# EAGLE board AirQuality (EAGLE 5.12)
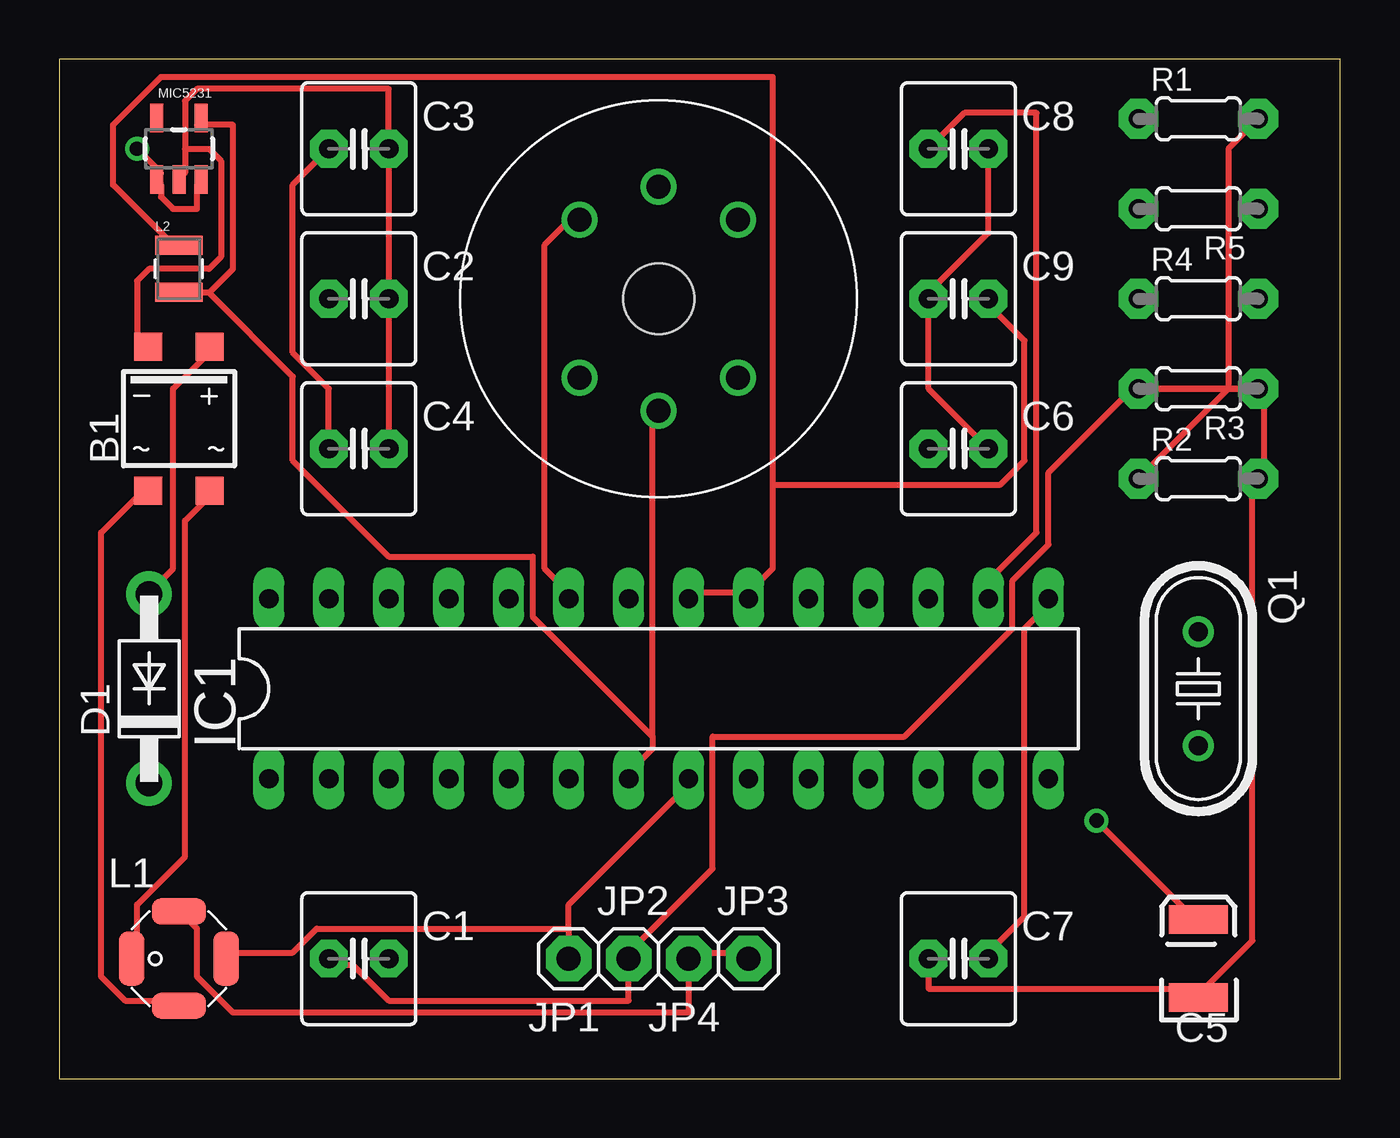
[diagram p0: board, top side]
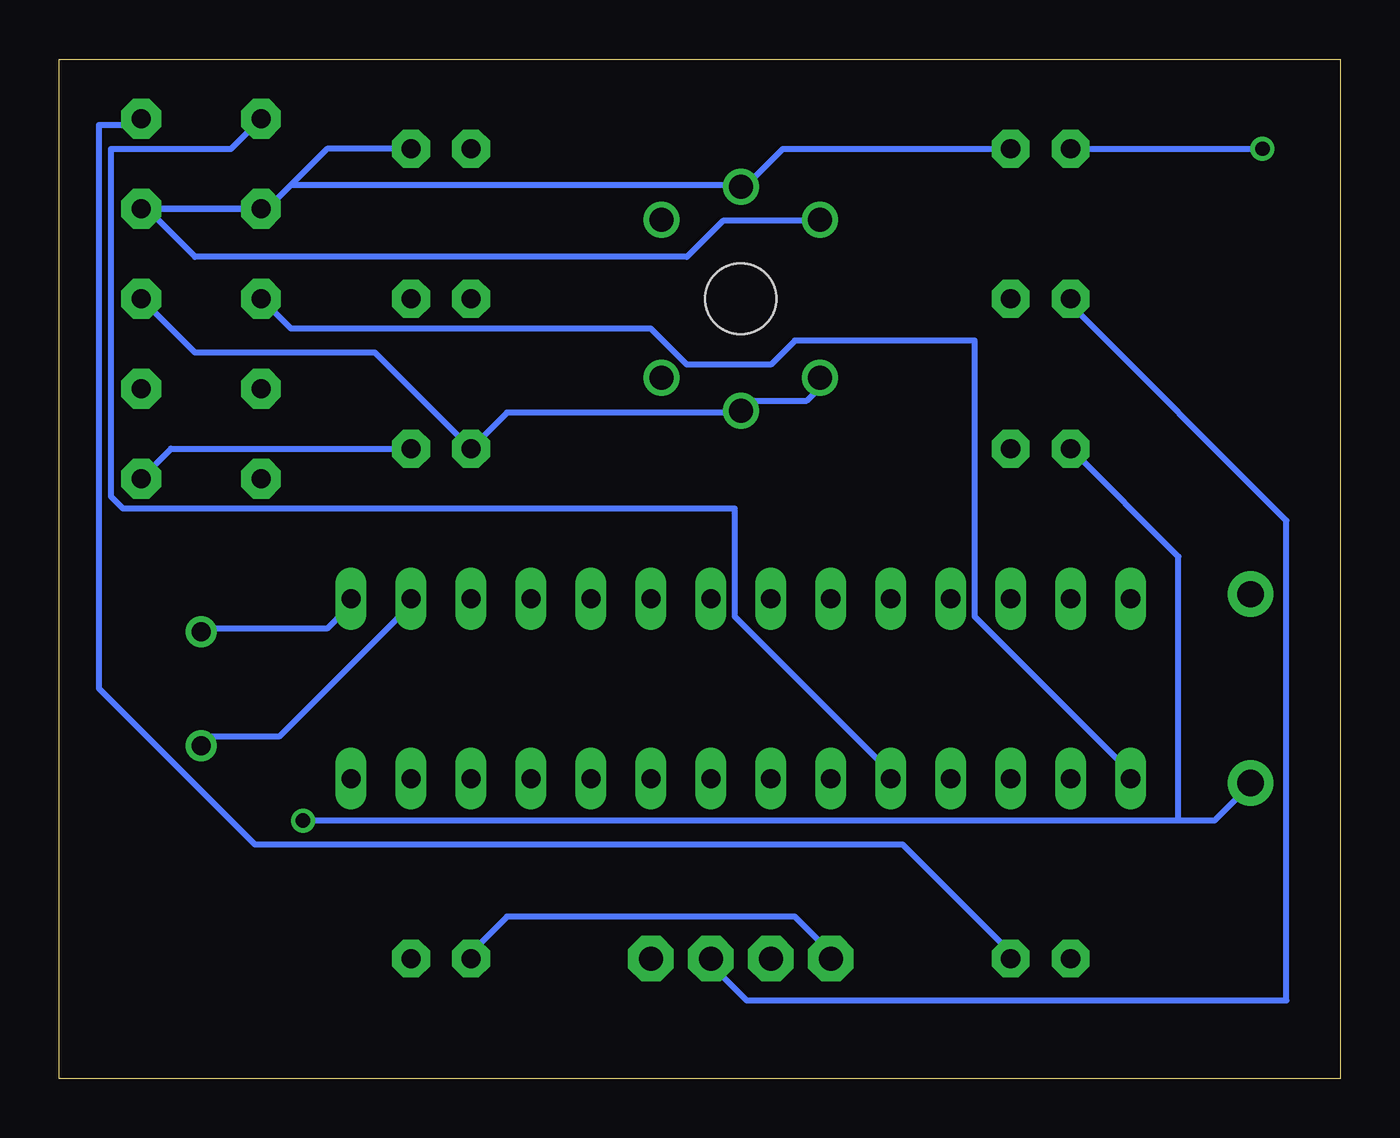
[diagram p1: board, bottom side, seen from below]

Size 54.28 x 43.17 mm. Coordinates in mm from the lower left corner, seen from the top.
Outline: 0,0 54.28,0 54.28,43.17 0,43.17 0,0
Copper layers (1*16): Top 0.035mm / dielectric 1.5mm / Bottom 0.035mm
Design rules "default": minimum track width 10mil, minimum drill 24mil, track to track 8mil, track to pad 8mil, pad to pad 8mil, via to via 8mil, smd to smd 8mil, copper to edge 40mil, drill to drill 8mil, minimum pad ring 10mil, minimum via ring 8mil, stop-mask expansion 4mil, vias tented up to drill 0mil, thermal gap 10mil

## Footprints (pad centres in the part's own frame; a part is rotated, then mirrored left to right if it is on the bottom)
SOIC-4 = smd 1.2 x 1.2: + 1.3,3.05; - -1.3,3.05; ~1 -1.3,-3.05; ~2 1.3,-3.05
C2.5-6 = drill 0.813 pad 1.6 octagon: 1 -1.27,0; 2 1.27,0
EIA3528 = smd 1.2 x 2.5: A 1.65,0; C -1.65,0
DO41-7 = drill 1.118 pad 1.93 round: A 4,0; C -4,0
DIL28-3 = drill 0.813 long: 1 -16.51,-3.81; 2 -13.97,-3.81; 3 -11.43,-3.81; 4 -8.89,-3.81; 5 -6.35,-3.81; 6 -3.81,-3.81; 7 -1.27,-3.81; 8 1.27,-3.81; 9 3.81,-3.81; 10 6.35,-3.81; 11 8.89,-3.81; 12 11.43,-3.81; 13 13.97,-3.81; 14 16.51,-3.81; 15 16.51,3.81; 16 13.97,3.81; 17 11.43,3.81; 18 8.89,3.81; 19 6.35,3.81; 20 3.81,3.81; 21 1.27,3.81; 22 -1.27,3.81; 23 -3.81,3.81; 24 -6.35,3.81; 25 -8.89,3.81; 26 -11.43,3.81; 27 -13.97,3.81; 28 -16.51,3.81
1X01 = drill 1.016 pad 1.93 octagon: 1 0,0
LPD4012 = smd 1.1 x 2.3: 1 -2,0; 3 2,0 | smd 2.3 x 1.1: 2 0,-2; 4 0,2
1007 = smd 2 x 0.8: 1 0,1; 2 0,-1
SOT23-5 = smd 0.55 x 1.2: 1 -0.95,-1.3; 2 0,-1.3; 3 0.95,-1.3; 4 0.95,1.3; 5 -0.95,1.3
MQ-3 = drill 1.016 round: A1 -3.35,3.35; A2 -3.35,-3.35; B1 3.35,3.35; B2 3.35,-3.35; HA -4.75,0; HB 4.75,0 | hole 3: 0,0
HC49U-V = drill 0.813 round: 1 -2.413,0; 2 2.413,0
0204/5 = drill 0.813 pad 1.676 octagon: 1 -2.54,0; 2 2.54,0

## Placement (x,y rotation side)
B1  MB1S  [SOIC-4]  5.08,27.94 0 top
C1  0.2uF  [C2.5-6]  12.7,5.08 0 top
C2  0.2uF  [C2.5-6]  12.7,33.02 0 top
C3  10uF  [C2.5-6]  12.7,39.37 0 top
C4  1uF  [C2.5-6]  12.7,26.67 0 top
C5  2.2uF  [EIA3528]  48.26,5.08 90 top
C6  10uF  [C2.5-6]  38.1,26.67 0 top
C7  0.2uF  [C2.5-6]  38.1,5.08 0 top
C8  0.2uF  [C2.5-6]  38.1,39.37 0 top
C9  100nF  [C2.5-6]  38.1,33.02 0 top
D1  [DO41-7]  3.81,16.51 90 top
IC1  ATMEGA168-20P  [DIL28-3]  25.4,16.51 0 top
JP1  [1X01]  21.59,5.08 180 top
JP2  [1X01]  24.13,5.08 0 top
JP3  [1X01]  29.21,5.08 0 top
JP4  [1X01]  26.67,5.08 180 top
L1  LPD4012  [LPD4012]  5.08,5.08 0 top
L2  10uH  [1007]  5.08,34.29 0 top
MIC5231  [SOT23-5]  5.08,39.37 0 top
MQ-135  GAS_SENSOR  [MQ-3]  25.4,33.02 90 top
Q1  16 MHz  [HC49U-V]  48.26,16.51 270 top
R1  10k  [0204/5]  48.26,40.64 0 top
R2  2k  [0204/5]  48.26,25.4 0 top
R3  2k  [0204/5]  48.26,29.21 180 top
R4  10k  [0204/5]  48.26,33.02 0 top
R5  10k  [0204/5]  48.26,36.83 180 top

## Library data of the parts
B1 = rectifier
C1-C4 C6-C9 = capacitor-wima
C5 L2 MIC5231 MQ-135 = SparkFun
D1 IC1 JP1-JP4 R1-R5 = adafruit
L1 = LPD4012
Q1 = crystal; OC_FARNELL: 1666969; OC_NEWARK: unknown

## Nets
N$1: IC1.1 R4.1
N$2: C1.2 R1.2 R2.1
N$3: C1.1 JP2.1 R3.1
N$4: C3.1 C4.1 C5.A D1.C MIC5231.1 MIC5231.3
N$5: C6.1 IC1.7 L2.2 MIC5231.4 MQ-135.A1 MQ-135.HA R4.2
N$6: C2.1 JP3.1 JP4.1 L1.4
N$7: B1.~1 L1.2
N$8: B1.~2 L1.1
N$9: B1.+ D1.A
N$10: C8.1 IC1.16 Q1.2
N$11: B1.- C2.2 C3.2 C4.2 C5.C C6.2 C7.1 C8.2 C9.1 IC1.8 JP1.1 L1.3 MIC5231.2 MQ-135.HB R2.2 R3.2 R5.1
N$12: C9.2 IC1.20 IC1.21 L2.1
N$13: IC1.5 R1.1
N$14: IC1.23 MQ-135.B1 R5.2
N$16: C7.2 IC1.15 Q1.1

## Tracks (layer width: path | path; a pad name or v marks a point on that pad's centre or on a via)
N$1
  Bottom 0.254: IC1.1 8.89,12.95 15.49,19.56 15.49,31.24 23.11,31.24 24.13,30.23 27.69,30.23 29.21,31.75 44.45,31.75 R4.1
N$2
  Top 0.254: R2.1 49.53,29.21 49.53,39.37 R1.2
  Bottom 0.254: C1.2 13.97,5.33 18.54,9.91 45.97,9.91 52.58,16.51 52.58,40.39 51.05,40.39 R1.2
N$3
  Top 0.254: C1.1 11.43,4.83 12.45,4.83 13.97,3.3 24.13,3.3 JP2.1 24.13,5.33 27.69,8.89 27.69,14.48 35.81,14.48 40.39,19.05 40.39,21.08 41.91,22.61 41.91,25.65 45.47,29.21 R3.1
N$4  (via drill 0.61)
  Top 0.254: MIC5231.3 5.84,37.85 5.84,36.83 4.83,36.83 4.32,37.34 4.32,37.85 MIC5231.1 4.32,38.35 v3.3,39.37 | v43.94,10.92 48.01,6.86 C5.A | C3.1 9.91,37.85 9.91,30.73 11.43,29.21 C4.1
  Bottom 0.254: C3.1 v3.3,39.37 | 6.86,10.92 5.33,10.92 3.81,12.45 D1.C | 6.86,10.92 v43.94,10.92 | C4.1 6.86,22.1 6.86,10.92
N$5
  Top 0.254: 6.35,33.27 7.37,34.29 7.37,40.39 5.84,40.39 MIC5231.4 | 6.35,33.27 5.33,33.27 L2.2 | 25.15,14.48 25.15,28.19 MQ-135.HA | 25.15,14.48 25.15,13.97 24.13,12.95 IC1.7 | 6.35,33.27 9.91,29.72 9.91,26.16 13.97,22.1 20.07,22.1 20.07,19.56 25.15,14.48
  Bottom 0.254: MQ-135.A1 22.1,29.21 22.61,28.7 25.15,28.7 MQ-135.HA 25.65,28.19 35.31,28.19 C6.1 40.89,30.73 48.51,30.73 R4.2
N$6
  Top 0.254: L1.4 5.33,6.86 5.84,6.35 5.84,4.32 7.37,2.79 26.67,2.79 JP4.1 26.67,5.33 29.21,5.33 JP3.1
  Bottom 0.254: C2.1 11.43,32.77 2.29,23.62 2.29,3.3 25.15,3.3 26.67,4.83 JP4.1
N$7
  Top 0.254: B1.~1 3.3,24.64 1.78,23.11 1.78,4.32 2.79,3.3 4.83,3.3 L1.2
N$8
  Top 0.254: B1.~2 6.35,24.64 5.33,23.62 5.33,9.4 3.3,7.37 3.3,5.33 L1.1
N$9
  Top 0.254: B1.+ 6.35,30.73 4.83,29.21 4.83,21.59 3.81,20.57 D1.A
N$10
  Top 0.254: C8.1 38.35,40.89 41.4,40.89 41.4,23.11 39.37,21.08 IC1.16
  Bottom 0.254: IC1.16 39.37,20.07 44.96,14.48 48.01,14.48 Q1.2
N$11
  Top 0.254: C4.2 C2.2 C3.2 13.97,41.91 5.84,41.91 5.33,41.4 5.33,39.37 | 5.33,39.37 6.35,39.37 6.86,38.86 6.86,34.8 6.35,34.29 3.81,34.29 3.3,33.78 3.3,31.24 B1.- | 5.33,39.37 5.33,38.35 MIC5231.2 | 21.59,6.35 10.92,6.35 9.91,5.33 7.37,5.33 L1.3 | 21.59,6.35 JP1.1 | 21.59,6.35 21.59,7.37 26.67,12.45 IC1.8 | C7.1 36.83,3.81 48.01,3.81 C5.C 48.51,3.81 50.55,5.84 50.55,25.15 R2.2 51.05,25.65 51.05,29.21 R3.2 | C8.2 39.37,35.81 36.83,33.27 C9.1 36.83,29.21 C6.2
  Bottom 0.254: C3.2 23.62,39.37 25.15,37.85 MQ-135.HB 25.65,37.85 44.45,37.85 | 44.45,37.85 42.93,39.37 C8.2 | 44.45,37.85 45.47,36.83 R5.1 | C6.2 49.53,26.67 R2.2 | JP1.1 21.59,5.33 23.11,6.86 35.31,6.86 36.83,5.33 C7.1
N$12
  Top 0.254: 30.23,25.15 30.23,21.59 29.21,20.57 | 30.23,25.15 30.23,42.42 4.32,42.42 2.29,40.39 2.29,37.85 4.83,35.31 L2.1 | 29.21,20.57 26.67,20.57 IC1.21 | 29.21,20.57 IC1.20 | 30.23,25.15 39.88,25.15 40.89,26.16 40.89,31.24 39.37,32.77 C9.2
N$13
  Bottom 0.254: IC1.5 19.05,12.95 25.65,19.56 25.65,24.13 51.56,24.13 52.07,24.64 52.07,39.37 46.99,39.37 R1.1
N$14
  Top 0.254: IC1.23 21.59,20.57 20.57,21.59 20.57,35.31 21.59,36.32 MQ-135.B1
  Bottom 0.254: R5.2 50.55,36.83 48.51,34.8 27.69,34.8 26.16,36.32 22.1,36.32 MQ-135.B1
N$16
  Top 0.254: C7.2 39.37,5.33 40.89,6.86 40.89,19.05 41.91,20.07 IC1.15
  Bottom 0.254: IC1.15 41.91,20.07 42.93,19.05 48.01,19.05 Q1.1